# EAGLE board led_slave_2x2 (EAGLE 6.1)
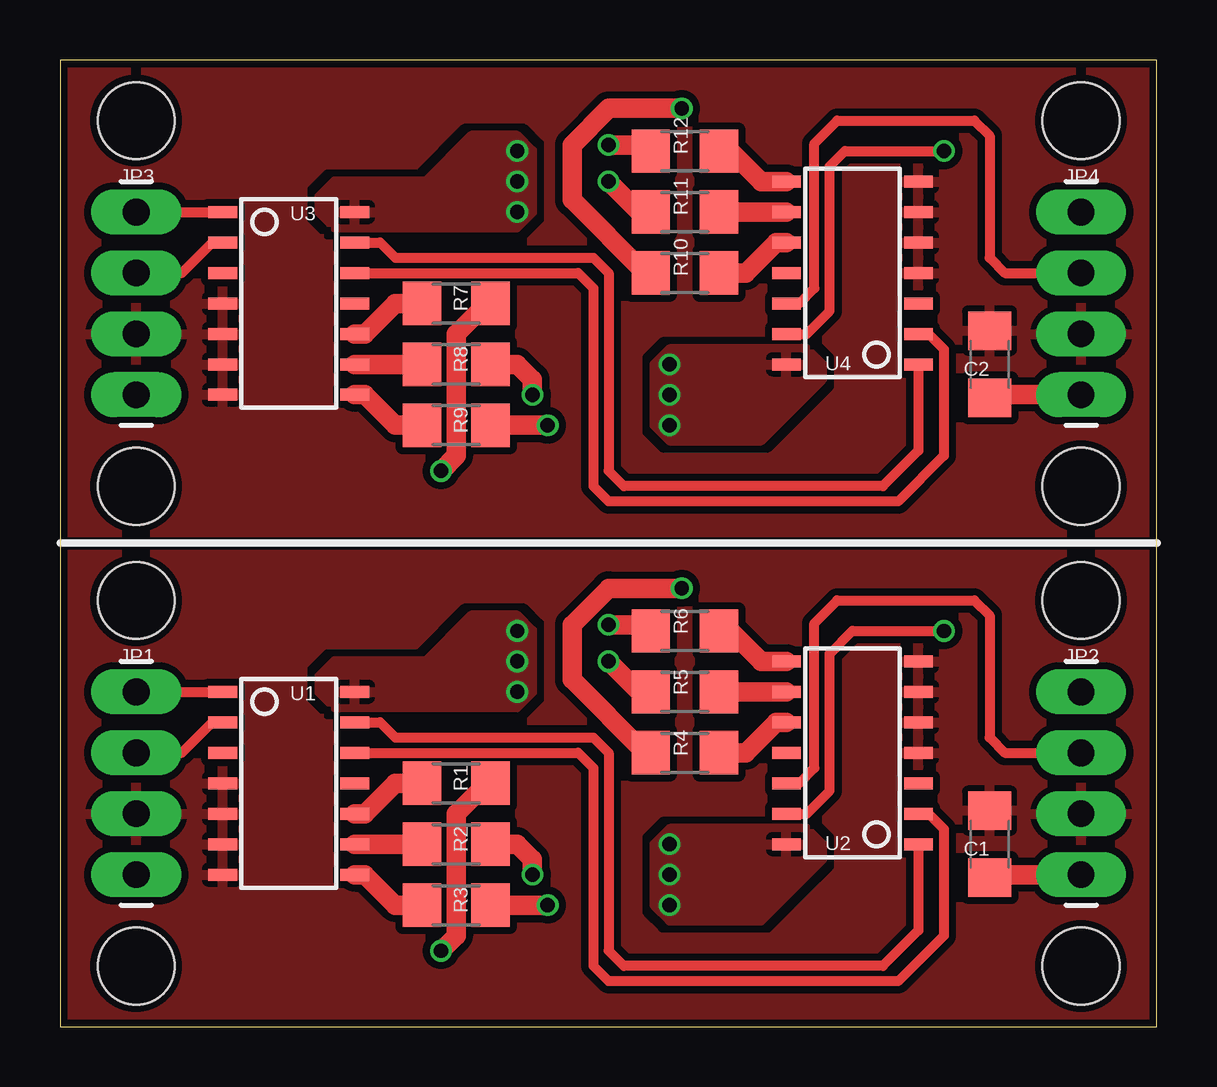
[diagram p0: board, top side]
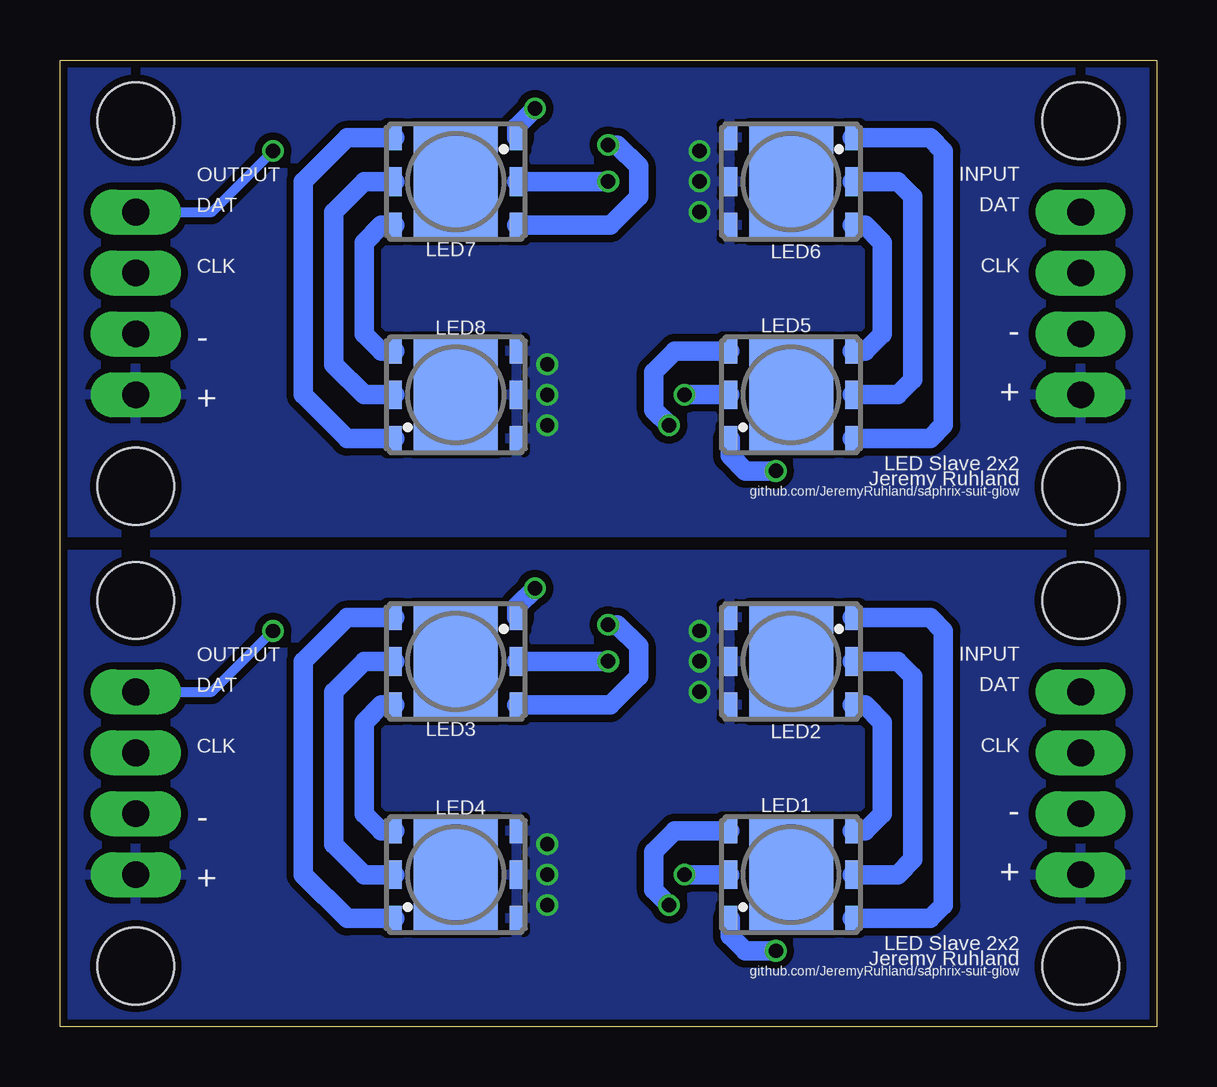
[diagram p1: board, bottom side, seen from below]

Size 45.7 x 40.31 mm. Coordinates in mm from the lower left corner, seen from the top.
Outline: 0,0 45.7,0 45.7,40.31 0,40.31 0,0
Copper layers (1*16): Top 0.035mm / dielectric 1.5mm / Bottom 0.035mm
Design rules: minimum track width 6mil, minimum drill 12mil, track to track 6mil, track to pad 6mil, pad to pad 6mil, via to via 6mil, smd to smd 0mil, copper to edge 10mil, drill to drill 10mil, minimum pad ring 10mil, minimum via ring 6mil, stop-mask expansion 2mil, vias tented up to drill 100mil, thermal gap 10mil
Holes 3.2 mm at 3.17,17.78 3.17,2.54 42.55,2.54 42.55,17.78 3.17,37.78 3.17,22.54 42.55,22.54 42.55,37.78

## Footprints (pad centres in the part's own frame; a part is rotated, then mirrored left to right if it is on the bottom)
C1206 = smd 1.6 x 1.8: 1 -1.4,0; 2 1.4,0
1X04_LONGPADS = drill 1.118 pad 1.88 long: 1 0,0; 2 2.54,0; 3 5.08,0; 4 7.62,0
F50360 = smd 0.6 x 1.05: BA 2.55,1.825; BC -2.55,1.825; RA 2.55,-1.825; RC -2.55,-1.825 | smd 0.6 x 1.2: GA 2.55,0; GC -2.55,0 | smd 3.5 x 4.7: NC 0,0
R1206 = smd 1.6 x 1.803: 1 -1.422,0; 2 1.422,0
SOP-14 = smd 0.5 x 1.2: 1 -3.81,-2.75; 2 -2.54,-2.75; 3 -1.27,-2.75; 4 0,-2.75; 5 1.27,-2.75; 6 2.54,-2.75; 7 3.81,-2.75; 8 3.81,2.75; 9 2.54,2.75; 10 1.27,2.75; 11 0,2.75; 12 -1.27,2.75; 13 -2.54,2.75; 14 -3.81,2.75

## Placement (x,y rotation side)
C1  [C1206]  38.73,7.62 90 top
C2  [C1206]  38.73,27.62 90 top
JP1  [1X04_LONGPADS]  3.17,6.35 90 top
JP2  [1X04_LONGPADS]  42.55,6.35 90 top
JP3  [1X04_LONGPADS]  3.17,26.35 90 top
JP4  [1X04_LONGPADS]  42.55,26.35 90 top
LED1  F50360  [F50360]  15.24,6.35 0 bottom
LED2  F50360  [F50360]  15.24,15.24 180 bottom
LED3  F50360  [F50360]  29.21,15.24 180 bottom
LED4  F50360  [F50360]  29.21,6.35 0 bottom
LED5  F50360  [F50360]  15.24,26.35 0 bottom
LED6  F50360  [F50360]  15.24,35.24 180 bottom
LED7  F50360  [F50360]  29.21,35.24 180 bottom
LED8  F50360  [F50360]  29.21,26.35 0 bottom
R1  [R1206]  16.51,10.16 180 top
R2  [R1206]  16.51,7.62 180 top
R3  [R1206]  16.51,5.08 180 top
R4  [R1206]  26.04,11.43 0 top
R5  [R1206]  26.04,13.97 0 top
R6  [R1206]  26.04,16.51 0 top
R7  [R1206]  16.51,30.16 180 top
R8  [R1206]  16.51,27.62 180 top
R9  [R1206]  16.51,25.08 180 top
R10  [R1206]  26.04,31.43 0 top
R11  [R1206]  26.04,33.97 0 top
R12  [R1206]  26.04,36.51 0 top
U1  WS2801  [SOP-14]  9.53,10.16 270 top
U2  WS2801  [SOP-14]  33.02,11.43 90 top
U3  WS2801  [SOP-14]  9.53,30.16 270 top
U4  WS2801  [SOP-14]  33.02,31.43 90 top

## Library data of the parts
C1 C2 R1-R12 = adafruit
JP1-JP4 U1-U4 = sparkfun
LED1-LED8 = led

## Nets
N$1: JP1.3 U1.2
N$2: JP1.4 U1.1
N$3: U1.13 U2.1
N$4: U1.12 U2.2
N$5: R1.2 U1.10
N$6: R2.2 U1.9
N$7: R3.2 U1.8
N$8: LED3.BA LED4.BC
N$9: LED3.GA LED4.GC
N$10: LED3.RA LED4.RC
N$11: LED1.BC R3.1
N$12: LED1.GC R2.1
N$13: JP2.3 U2.12
N$14: JP2.4 U2.13
N$15: LED1.BA LED2.BC
N$16: LED1.GA LED2.GC
N$17: LED1.RA LED2.RC
N$18: LED3.BC R6.1
N$19: LED3.GC R5.1
N$20: LED3.RC R4.1
N$21: LED1.RC R1.1
N$22: R6.2 U2.8
N$23: R5.2 U2.9
N$24: R4.2 U2.10
N$25: C1.2 JP1.2 JP2.2 U1.4 U1.5 U1.6 U1.7 U2.4 U2.5 U2.6 U2.7
N$26: C1.1 JP1.1 JP2.1 LED2.BA LED2.GA LED2.RA LED4.BA LED4.GA LED4.RA U1.14 U2.14
N$31: U3.13 U4.1
N$32: U3.12 U4.2
N$33: LED5.BA LED6.BC
N$34: LED5.GA LED6.GC
N$35: LED5.RA LED6.RC
N$36: R7.2 U3.10
N$37: R8.2 U3.9
N$38: R9.2 U3.8
N$39: LED5.BC R9.1
N$40: LED5.GC R8.1
N$41: LED5.RC R7.1
N$42: LED7.BA LED8.BC
N$43: LED7.GA LED8.GC
N$44: LED7.RA LED8.RC
N$45: LED7.BC R12.1
N$46: LED7.GC R11.1
N$47: LED7.RC R10.1
N$48: R12.2 U4.8
N$49: R11.2 U4.9
N$50: R10.2 U4.10
N$51: C2.2 JP3.2 JP4.2 U3.4 U3.5 U3.6 U3.7 U4.4 U4.5 U4.6 U4.7
N$53: JP3.3 U3.2
N$54: JP3.4 U3.1
N$55: JP4.3 U4.12
N$56: JP4.4 U4.13
N$57: C2.1 JP3.1 JP4.1 LED6.BA LED6.GA LED6.RA LED8.BA LED8.GA LED8.RA U3.14 U4.14

## Tracks (layer width: path | path; a pad name or v marks a point on that pad's centre or on a via)
N$1
  Top 0.406: JP1.3 5.08,11.43 6.35,12.7 U1.2
N$2
  Top 0.406: JP1.4 U1.1
N$3
  Top 0.406: U1.13 13.34,12.7 13.97,12.06 22.23,12.06 22.86,11.43 22.86,3.17 23.5,2.54 34.29,2.54 35.77,4.02 U2.1
N$4
  Top 0.406: U1.12 21.59,11.43 22.23,10.79 22.23,2.54 22.86,1.91 34.92,1.91 36.83,3.81 36.83,8.26 36.2,8.89 U2.2
N$5
  Top 0.813: U1.10 12.7,8.89 13.97,10.16 R1.2
N$6
  Top 0.813: U1.9 R2.2
N$7
  Top 0.813: U1.8 12.7,6.35 13.97,5.08 R3.2
N$8
  Bottom 0.813: LED3.BA 32.3,13.41 33.02,12.7 33.02,8.89 32.3,8.18 LED4.BC
N$9
  Bottom 0.813: LED3.GA 33.02,15.24 34.29,13.97 34.29,7.62 33.02,6.35 LED4.GC
N$10
  Bottom 0.813: LED3.RA 33.73,17.07 35.56,15.24 35.56,6.35 33.73,4.53 LED4.RC
N$11  (via drill 0.6)
  Top 0.813: R3.1 v20.32,5.08
  Bottom 0.813: LED1.BC 20.08,8.18 20.95,7.3 20.95,5.71 v20.32,5.08
N$12  (via drill 0.6)
  Top 0.813: 17.78,7.62 R2.1 19.05,7.62 19.68,6.99 v19.68,6.35
  Bottom 0.813: LED1.GC v19.68,6.35
N$13
  Top 0.406: JP2.3 39.37,11.43 38.73,12.06 38.73,17.14 38.1,17.78 32.38,17.78 31.43,16.83 31.43,10.79 30.8,10.16 U2.12
N$14  (via drill 0.6)
  Top 0.406: v36.83,16.51 33.02,16.51 32.07,15.56 32.07,9.84 31.11,8.89 U2.13
  Bottom 0.406: JP2.4 39.37,13.97 v36.83,16.51
N$15
  Bottom 0.813: LED2.BC 12.14,13.41 11.43,12.7 11.43,8.89 12.14,8.18 LED1.BA
N$16
  Bottom 0.813: LED1.GA 10.79,6.35 10.16,6.99 10.16,14.61 10.79,15.24 LED2.GC
N$17
  Bottom 0.813: LED1.RA 9.45,4.53 8.89,5.08 8.89,16.51 9.45,17.07 LED2.RC
N$18  (via drill 0.6)
  Top 0.813: v22.86,16.76 24.38,16.76 R6.1
  Bottom 0.813: LED3.BC 22.78,13.41 21.59,14.61 21.59,15.88 22.48,16.76 v22.86,16.76
N$19  (via drill 0.6)
  Top 0.813: v22.86,15.24 24.38,13.72 R5.1
  Bottom 0.813: v22.86,15.24 LED3.GC
N$20  (via drill 0.6)
  Top 0.813: v25.91,18.29 22.86,18.29 21.34,16.76 21.34,14.48 24.38,11.43 R4.1
  Bottom 0.813: LED3.RC 26.66,17.54 v25.91,18.29
N$21  (via drill 0.6)
  Top 0.813: R1.1 17.78,10.16 16.51,8.89 16.51,3.81 v15.88,3.17
  Bottom 0.813: v15.88,3.17 17.14,3.17 17.78,3.81 LED1.RC
N$22
  Top 0.813: U2.8 29.21,15.24 27.94,16.51 R6.2
N$23
  Top 0.813: U2.9 R5.2
N$24
  Top 0.813: U2.10 29.84,12.7 28.57,11.43 R4.2
N$25
  pour Top (isolate 0.305, rank 2): 0,0 45.72,0 45.72,19.68 0,19.68
N$26  (via drill 0.6)
  Top 0.813: JP2.1 38.87,6.35 C1.1
  other vias: 25.4,7.62 25.4,6.35 25.4,5.08 19.05,13.97 19.05,15.24 19.05,16.51
  pour Bottom (isolate 0.305): 0,19.68 45.72,19.68 45.72,0 0,0
  pour Top: 17.14,17.14 15.24,15.24 11.43,15.24 10.79,14.61 10.79,13.97 11.43,13.34 19.05,13.34 19.68,13.97 19.68,16.51 19.05,17.14
  pour Top: 31.11,8.26 25.4,8.26 24.77,7.62 24.77,5.08 25.4,4.45 29.21,4.45 31.75,6.99 31.75,7.62
N$31
  Top 0.406: U3.13 13.34,32.7 13.97,32.07 22.23,32.07 22.86,31.43 22.86,23.18 23.5,22.54 34.29,22.54 35.77,24.02 U4.1
N$32
  Top 0.406: U3.12 21.59,31.43 22.23,30.8 22.23,22.54 22.86,21.91 34.92,21.91 36.83,23.81 36.83,28.26 36.2,28.89 U4.2
N$33
  Bottom 0.813: LED6.BC 12.14,33.42 11.43,32.7 11.43,28.89 12.14,28.18 LED5.BA
N$34
  Bottom 0.813: LED5.GA 10.79,26.35 10.16,26.99 10.16,34.61 10.79,35.24 LED6.GC
N$35
  Bottom 0.813: LED5.RA 9.45,24.53 8.89,25.08 8.89,36.51 9.45,37.07 LED6.RC
N$36
  Top 0.813: U3.10 12.7,28.89 13.97,30.16 R7.2
N$37
  Top 0.813: U3.9 R8.2
N$38
  Top 0.813: U3.8 12.7,26.35 13.97,25.08 R9.2
N$39  (via drill 0.6)
  Top 0.813: R9.1 v20.32,25.08
  Bottom 0.813: LED5.BC 20.08,28.18 20.95,27.3 20.95,25.72 v20.32,25.08
N$40  (via drill 0.6)
  Top 0.813: 17.78,27.62 R8.1 19.05,27.62 19.68,26.99 v19.68,26.35
  Bottom 0.813: LED5.GC v19.68,26.35
N$41  (via drill 0.6)
  Top 0.813: R7.1 17.78,30.16 16.51,28.89 16.51,23.81 v15.88,23.18
  Bottom 0.813: v15.88,23.18 17.14,23.18 17.78,23.81 17.78,24.52 LED5.RC
N$42
  Bottom 0.813: LED7.BA 32.3,33.42 33.02,32.7 33.02,28.89 32.3,28.18 LED8.BC
N$43
  Bottom 0.813: LED7.GA 33.02,35.24 34.29,33.97 34.29,27.62 33.02,26.35 LED8.GC
N$44
  Bottom 0.813: LED7.RA 33.73,37.07 35.56,35.24 35.56,26.35 33.73,24.53 LED8.RC
N$45  (via drill 0.6)
  Top 0.813: v22.86,36.77 24.38,36.77 R12.1
  Bottom 0.813: LED7.BC 22.78,33.42 21.59,34.61 21.59,35.88 22.48,36.77 v22.86,36.77
N$46  (via drill 0.6)
  Top 0.813: v22.86,35.24 24.38,33.72 R11.1
  Bottom 0.813: v22.86,35.24 LED7.GC
N$47  (via drill 0.6)
  Top 0.813: v25.91,38.29 22.86,38.29 21.34,36.77 21.34,34.48 24.38,31.43 R10.1
  Bottom 0.813: LED7.RC 26.66,37.54 v25.91,38.29
N$48
  Top 0.813: U4.8 29.21,35.24 27.94,36.51 R12.2
N$49
  Top 0.813: U4.9 R11.2
N$50
  Top 0.813: U4.10 29.84,32.7 28.57,31.43 R10.2
N$51
  pour Top (isolate 0.305, rank 2): 45.72,40.32 0,40.32 0,20.64 45.72,20.64
N$53
  Top 0.406: JP3.3 5.08,31.43 6.35,32.7 U3.2
N$54
  Top 0.406: JP3.4 U3.1
N$55
  Top 0.406: JP4.3 39.37,31.43 38.73,32.07 38.73,37.15 38.1,37.78 32.38,37.78 31.43,36.83 31.43,30.8 30.8,30.16 U4.12
N$56  (via drill 0.6)
  Top 0.406: v36.83,36.51 32.7,36.51 32.07,35.88 32.07,29.84 31.11,28.89 U4.13
  Bottom 0.406: JP4.4 39.37,33.97 v36.83,36.51
N$57  (via drill 0.6)
  Top 0.813: JP4.1 38.87,26.35 C2.1
  other vias: 25.4,27.62 25.4,26.35 25.4,25.08 19.05,33.97 19.05,35.24 19.05,36.51
  pour Bottom (isolate 0.305): 45.72,20.64 0,20.64 0,40.32 45.72,40.32
  pour Top: 17.14,37.15 15.24,35.24 11.43,35.24 10.79,34.61 10.79,33.97 11.43,33.34 19.05,33.34 19.68,33.97 19.68,36.51 19.05,37.15
  pour Top: 31.11,28.26 25.4,28.26 24.77,27.62 24.77,25.08 25.4,24.45 29.21,24.45 31.75,26.99 31.75,27.62

## Text on the board
_bsilk: INPUT | DAT | OUTPUT | DAT | CLK | CLK | - | - | + | + | LED Slave 2x2 | Jeremy Ruhland | github.com/JeremyRuhland/saphrix-suit-glow | INPUT | DAT | OUTPUT | DAT | CLK | CLK | - | - | + | + | LED Slave 2x2 | Jeremy Ruhland | github.com/JeremyRuhland/saphrix-suit-glow